# Altium PCB SRF(1).PcbDoc
Units mm, origin at the board's own origin, x right, y up, seen from the top; angles counter-clockwise.
Board outline 152.4 x 101.6 mm, 2 copper layers (Top Layer, Bottom Layer); 10 components, 4 nets, 44 pads, 0 vias.
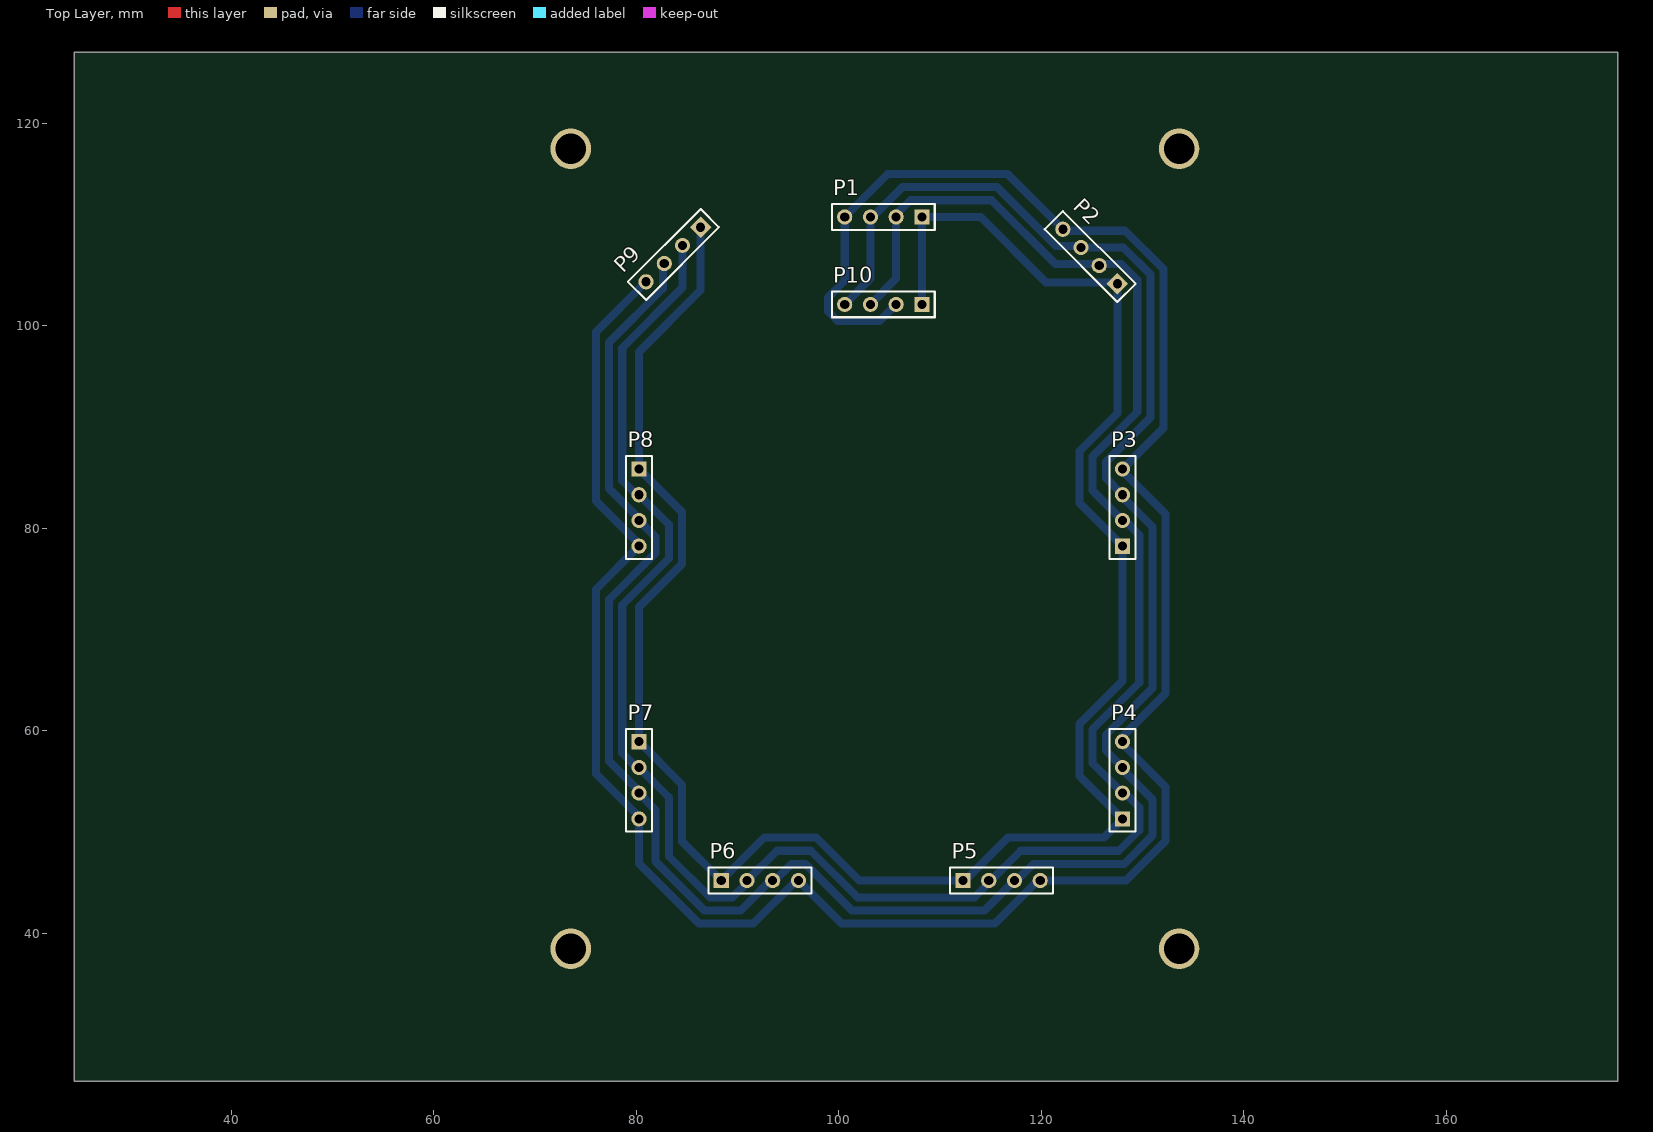
[diagram p0: Top Layer view]
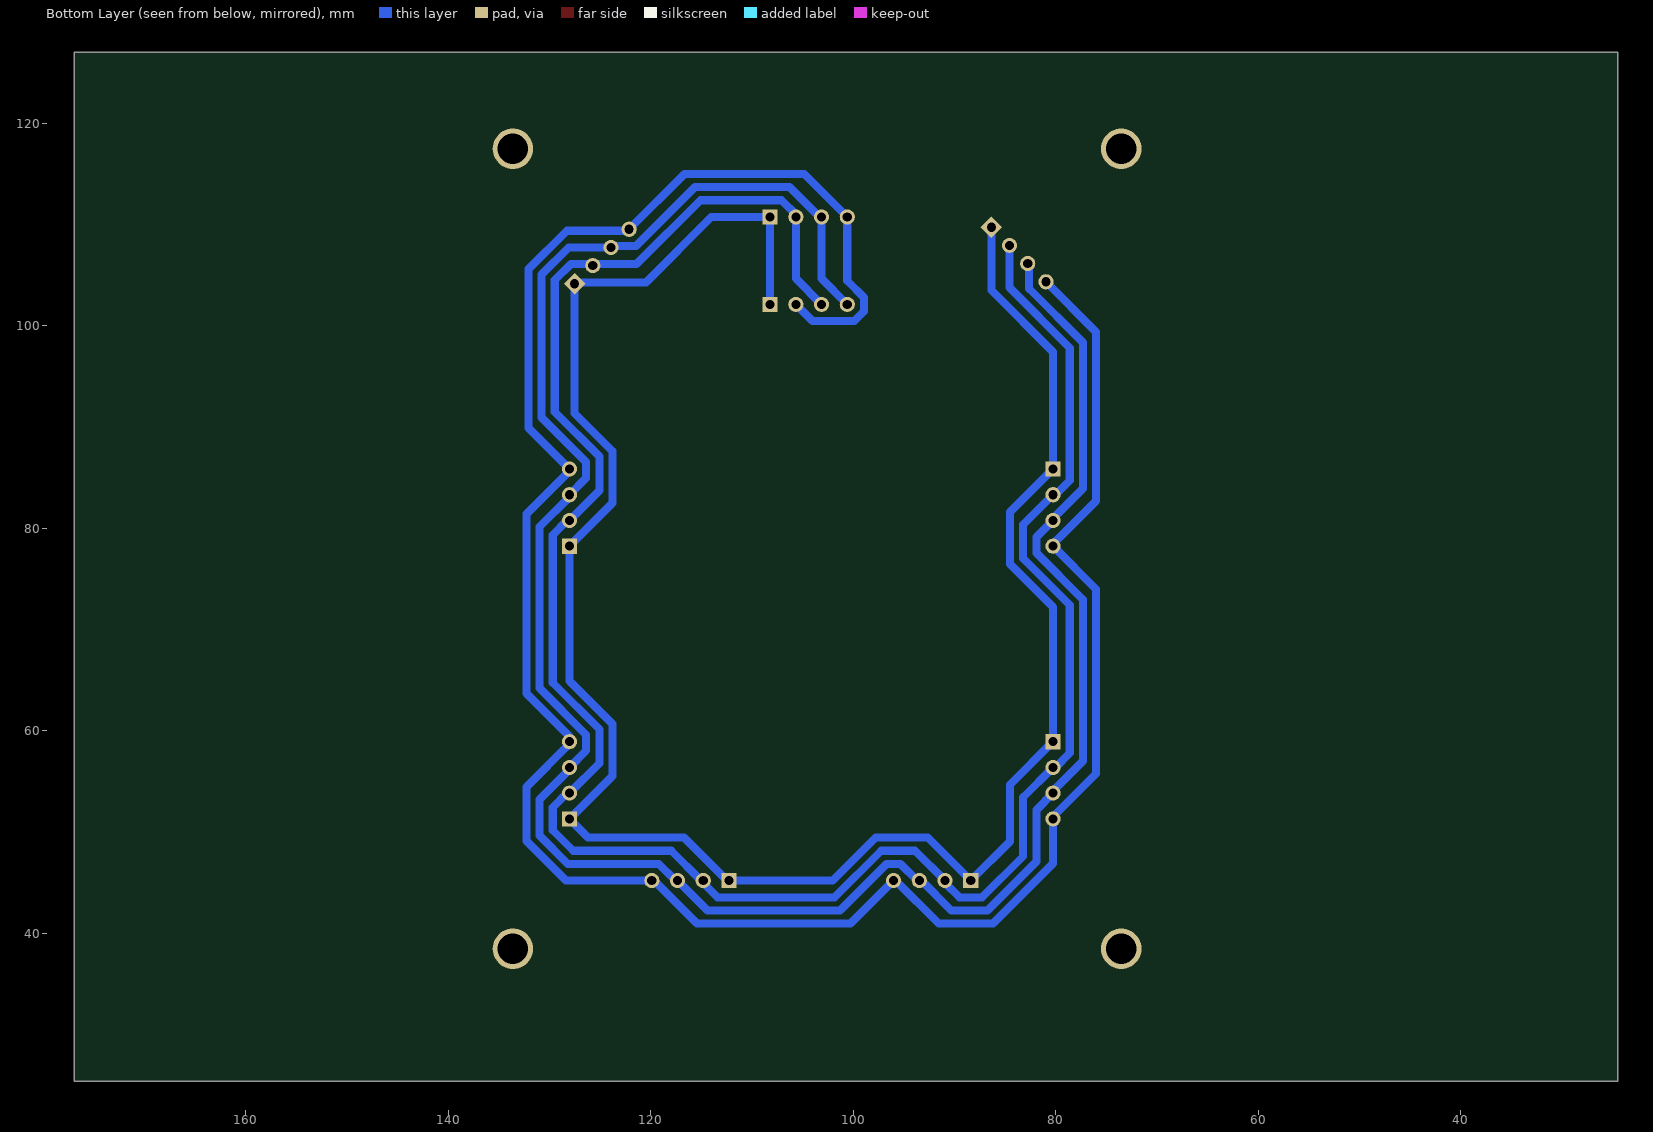
[diagram p1: Bottom Layer view, seen from below]

## Layer stack, top to bottom
Top Layer: signal copper 0.0356
Dielectric: dielectric 0.32, FR-4, Dk 4.8
Bottom Layer: signal copper 0.0356

## Board outline
24.511,25.4 176.911,25.4 176.911,127 24.511,127

## Design rules (kind name [scope] priority, off if disabled: settings)
Clearance [All] p1: gap=0.5
PolygonConnect [All] p1: connectstyle=Relief reliefconductorwidth=0.254 reliefentries=4 polygonreliefangle="90 Angle"
RoutingVias [All] p1: holewidth=0.711 width=1.27 viastyle="Through Hole" minholewidth=0.711 minwidth=1.27 maxholewidth=0.711 maxwidth=1.27
SilkscreenOverComponentPads [All] p1: minsilkscreentomaskgap=0.254
SolderMaskExpansion [All] p1: expansion=0.102
Width [All] p1: maxlimit=0.8 minlimit=0.8 preferedwidth=0.8 minimp=50.000000 maximp=50.000000 favimp=50.000000
27 further rules are at their usual default settings.

## Components (designator, comment, footprint, x,y, rotation, side; value= is the part's Value field where it differs from the comment)
P1 "Header 4" HDR1X4 108.204,110.744 r180 top
P2 "Header 4" HDR1X4 127.508,104.14 r135 top
P3 "Header 4" HDR1X4 128.016,78.232 r90 top
P4 "Header 4" HDR1X4 128.016,51.308 r90 top
P5 "Header 4" HDR1X4 112.268,45.212 r0 top
P6 "Header 4" HDR1X4 88.392,45.212 r0 top
P7 "Header 4" HDR1X4 80.264,58.928 r270 top
P8 "Header 4" HDR1X4 80.264,85.852 r270 top
P9 "Header 4" HDR1X4 86.36,109.728 r225 top
P10 "Header 4" HDR1X4 108.204,102.108 r180 top

## Footprints (in the part's own frame and the unit in brackets; to place one, negate y for a bottom-side part, rotate by r counter-clockwise, add the part's x,y. Pads: shape width x height; smd on the part's side, far side on the other; paste and mask are expansions set on the pad)
HDR1X4 [mm] "Connector; Header; 4 Position"
  rect 1.5x1.5 hole 0.9: 1(0,0)
  round 1.5 hole 0.9: 2(2.54,0) 3(5.08,0) 4(7.62,0)
  silkscreen extent -1.27,-1.27 8.89,1.27

## Part data
P1 P2 P3 P4 P5 P6 P7 P8 P9 P10: "Header, 4-Pin"

## Free pads (board coordinates)
  round 4 hole 3: 0(73.533,38.481) 0(73.533,117.475) 0(133.604,38.481) 0(133.604,117.475)

## Nets (pads, with @x,y where several pads share a name; then routed paths per layer and width w, separated by ;. In a path a pad name is that pad's centre, name@x,y a point inside that pad or via, vN(x,y) a via of type N, cw(c..) or ccw(c..) an arc to the next point about the centre after c; other vN are vias at no path point)
NetP1_1: P1.1 P2.1 P3.1 P4.1 P5.1 P6.1 P7.1 P8.1 P9.1 P10.1 | length 209.9
  Bottom Layer w0.8: P9.1 86.36,103.505 80.264,97.409 P8.1 84.514,81.602 84.514,76.472 80.264,72.222 P7.1 84.514,54.678 84.514,49.09 P6.1 92.642,49.462 97.772,49.462 102.022,45.212 P5.1 112.475,45.212 116.725,49.462 126.17,49.462 P4.1 123.766,55.558 123.766,60.688 128.016,64.938 P3.1 123.766,82.482 123.766,87.612 127.508,91.354 P2.1 127.362,104.286 120.47,104.286 114.012,110.744 P1.1 P10.1
NetP1_2: P1.2 P2.2 P3.2 P4.2 P5.2 P6.2 P7.2 P8.2 P9.2 P10.3 | length 223.3
  Bottom Layer w0.8: P9.2 84.564,103.76 78.614,97.81 78.614,84.729 80.031,83.312 P8.2 83.214,80.362 83.214,77.01 78.614,72.41 78.614,57.805 80.031,56.388 P7.2 83.214,53.438 83.214,47.617 87.269,43.562 89.515,43.562 90.932,44.979 P6.2 93.882,48.162 97.234,48.162 101.834,43.562 113.391,43.562 P5.2@114.808,44.979 ; P10.3 105.664,104.648 P1.2 105.664,110.977 107.081,112.394 115.082,112.394 121.394,106.082 125.566,106.082 P2.2 125.877,106.101 127.881,106.101 129.469,104.513 129.469,91.477 125.066,87.074 125.066,83.722 P3.2 128.249,80.772 129.666,79.355 129.666,64.75 125.066,60.15 125.066,56.798 P4.2 128.249,53.848 129.666,52.431 129.666,50.185 127.643,48.162 117.965,48.162 115.015,45.212 P5.2
NetP1_3: P1.3 P2.3 P3.3 P4.3 P5.3 P6.3 P7.3 P8.3 P9.3 P10.4 | length 230
  Bottom Layer w0.8: P9.3 82.622,105.99 82.622,103.656 77.314,98.349 77.314,83.929 80.264,80.979 P8.3 81.914,79.122 81.914,77.549 77.314,72.949 77.314,57.005 80.264,54.055 P7.3 81.914,52.198 81.914,47.079 86.731,42.262 90.315,42.262 93.265,45.212 P6.3 93.679,45.212 95.329,46.862 96.695,46.862 101.295,42.262 114.398,42.262 P5.3 117.555,45.212 119.205,46.862 128.181,46.862 130.966,49.647 130.966,53.231 128.016,56.181 P4.3 126.366,58.038 126.366,59.611 130.966,64.211 130.966,80.155 128.016,83.105 P3.3 126.366,84.962 126.366,86.535 130.769,90.938 130.769,105.051 128.088,107.732 P2.3 123.77,107.878 121.436,107.878 115.621,113.694 106.281,113.694 103.331,110.744 P1.3 103.124,104.648 P10.4
NetP1_4: P1.4 P2.4 P3.4 P4.4 P5.4 P6.4 P7.4 P8.4 P9.4 P10.2 | length 244.3
  Bottom Layer w0.8: P9.4 76.014,99.382 76.014,82.689 80.264,78.439 P8.4 76.014,73.982 76.014,55.765 80.264,51.515 P7.4 80.264,46.89 86.192,40.962 91.555,40.962 95.805,45.212 P6.4 100.262,40.962 115.431,40.962 P5.4@119.681,45.212 ; P10.2 104.014,100.458 99.901,100.458 98.934,101.425 98.934,102.791 100.584,104.441 P1.4 104.834,114.994 116.654,114.994 P2.4 122.266,109.382 128.276,109.382 132.069,105.59 132.069,89.905 P3.4 128.016,85.645 132.266,81.395 132.266,63.673 128.016,59.423 P4.4 128.016,58.721 132.266,54.471 132.266,49.108 128.37,45.212 P5.4

## Silkscreen, mask and mechanical layers (free items; w line width, h text height)
Mechanical 1:
  lines w0.254: 70.358,35.306 70.358,120.65 136.779,120.65 136.779,35.306 70.358,35.306 ; 86.995,51.816 121.158,51.816 121.158,95.631 86.995,95.631 86.995,51.816